# Altium PCB ANA_24.PcbDoc
Units mm, origin at the board's own origin, x right, y up, seen from the top; angles counter-clockwise.
Board outline 51.5 x 33.5 mm, 2 copper layers (Top Layer, Bottom Layer), stack 1.571 mm thick; 2 components, 4 nets, 5 pads, 163 vias.
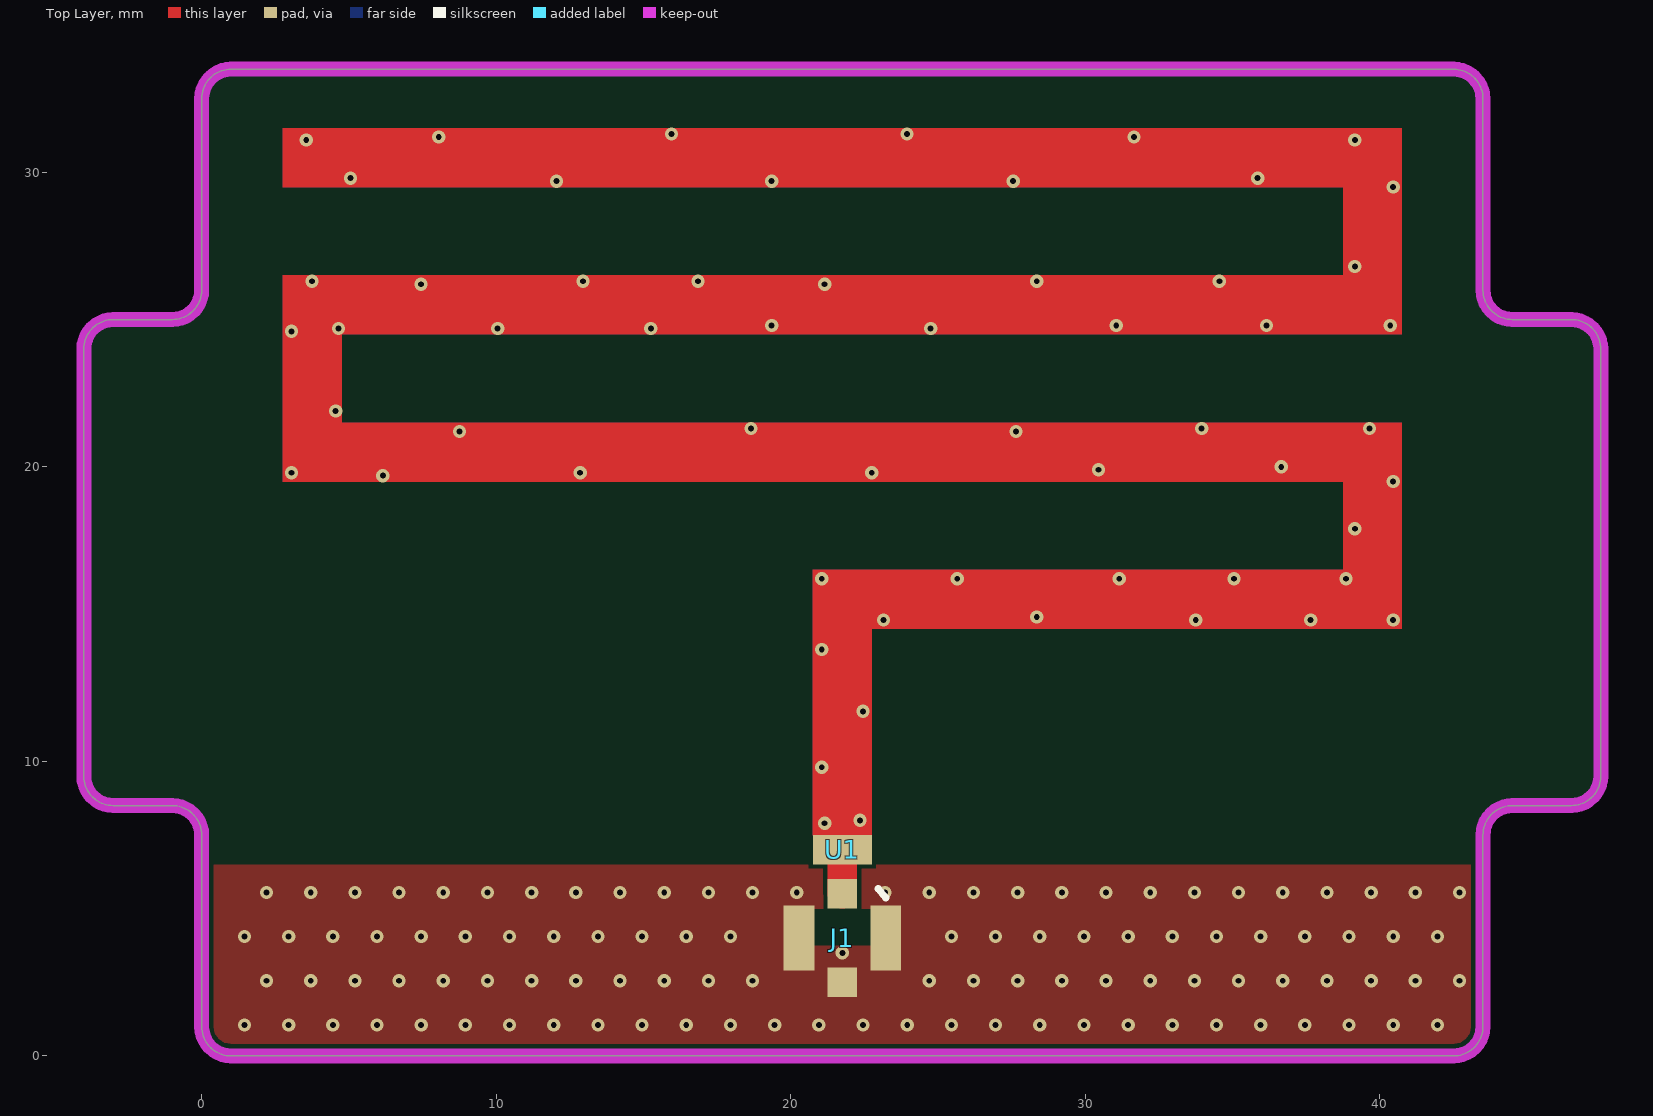
[diagram p0: Top Layer view]
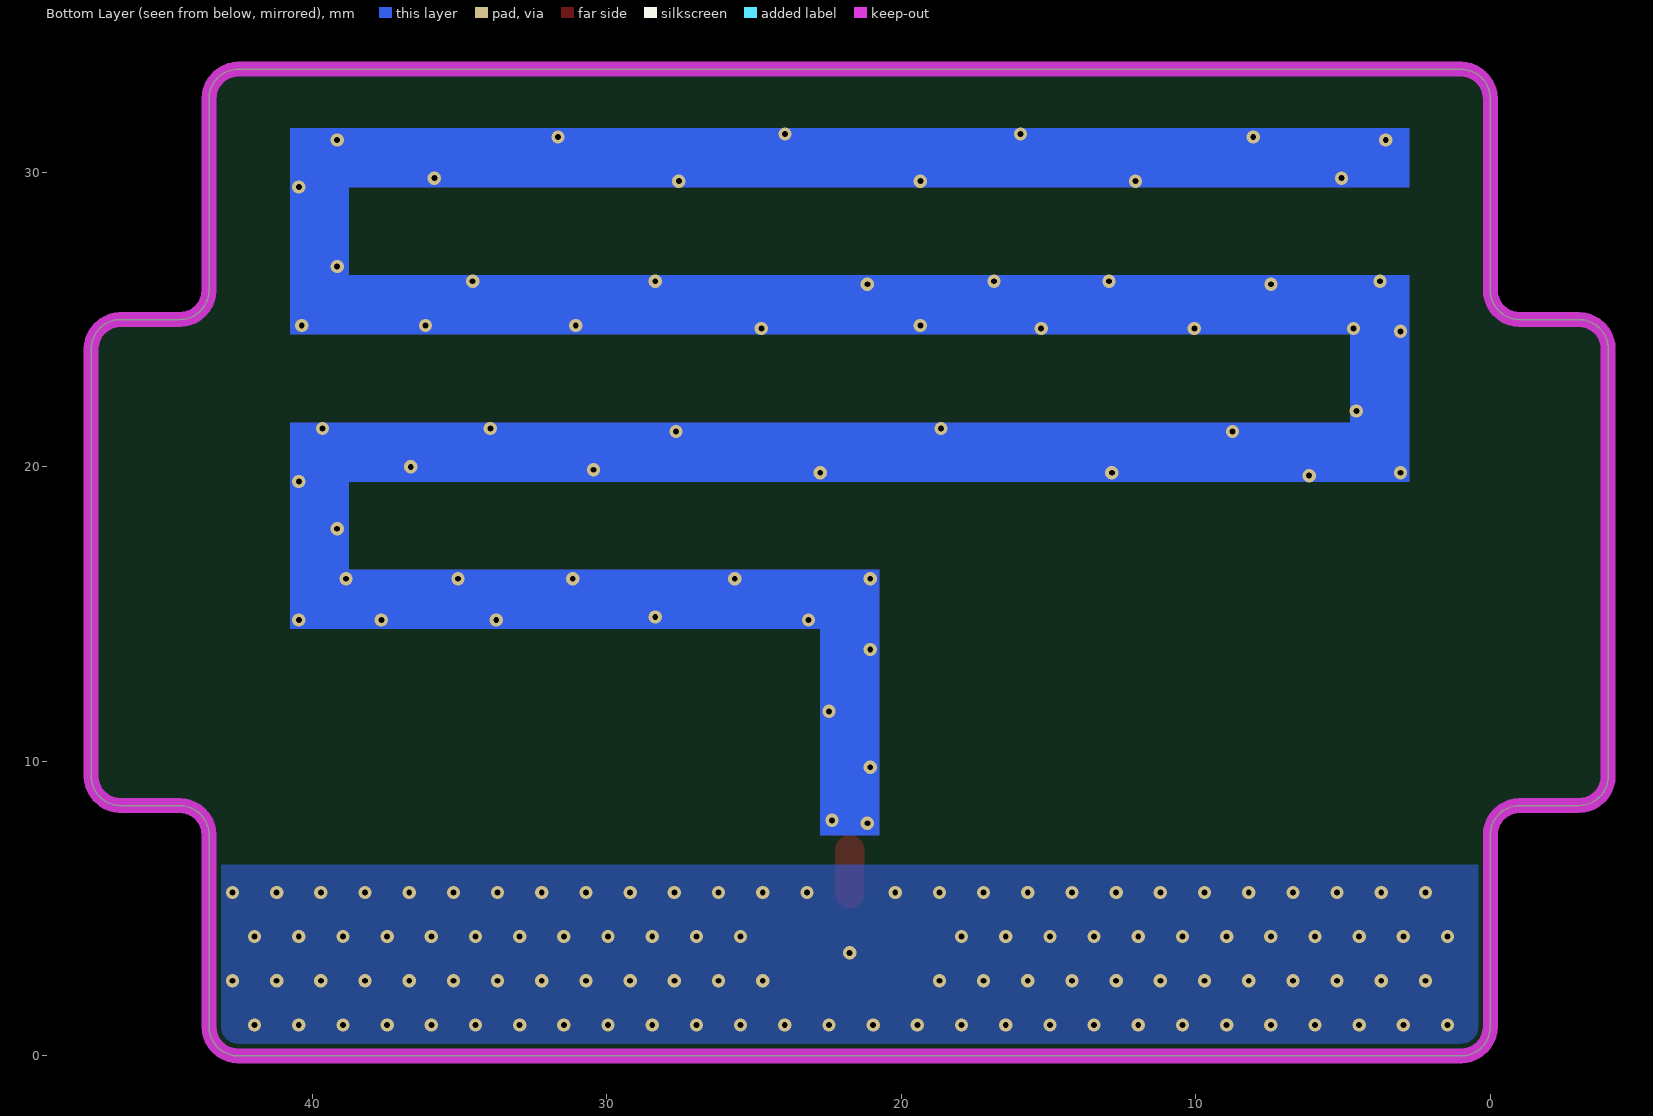
[diagram p1: Bottom Layer view, seen from below]

## Layer stack, top to bottom
Top Solder: solder mask 0.0102, Solder Resist, Dk 3.5
Top Layer: signal copper 0.0356
Dielectric 1: dielectric 1.5, FR-4, Dk 4.8
Bottom Layer: signal copper 0.0356
Bottom Solder: solder mask 0.0102, Solder Resist, Dk 3.5

## Board outline
-3,8.5 -1,8.5 cw(c-1,7.5) 0,7.5 0,1 ccw(c1,1) 1,0 42.5,0 ccw(c42.5,1) 43.5,1 43.5,7.5 cw(c44.5,7.5) 44.5,8.5 46.5,8.5 ccw(c46.5,9.5) 47.5,9.5 47.5,24 ccw(c46.5,24) 46.5,25 44.5,25 cw(c44.5,26) 43.5,26 43.5,32.5 ccw(c42.5,32.5) 42.5,33.5 1,33.5 ccw(c1,32.5) 0,32.5 0,26 cw(c-1,26) -1,25 -3,25 ccw(c-3,24) -4,24 -4,9.5 ccw(c-3,9.5)

## Design rules (kind name [scope] priority, off if disabled: settings)
Clearance [All] p1: gap=0.152 ignorepadtopadclearanceinfootprint=FALSE
PolygonConnect [All] p1: connectstyle=Direct reliefconductorwidth=0.254 reliefentries=4 polygonreliefangle="90 Angle" airgapwidth=0.254
RoutingVias [All] p1: holewidth=0.711 width=1.27 viastyle="Through Hole" minholewidth=0.2 minwidth=0.45 maxholewidth=5 maxwidth=5
SolderMaskExpansion [All] p1: expansion=0.102 istentingtop=FALSE
Width [All] p1: maxlimit=5 minlimit=0.254 preferedwidth=0.254
30 further rules are at their usual default settings.

## Components (designator, comment, footprint, x,y, rotation, side; value= is the part's Value field where it differs from the comment)
J1 "IPEX" molex-73412 21.75,4 r180 top
U1 "ANTENNA_PCB" ANTENNA_DN024N 21.75,7 r0 top

## Footprints (in the part's own frame and the unit in brackets; to place one, negate y for a bottom-side part, rotate by r counter-clockwise, add the part's x,y. Pads: shape width x height; smd on the part's side, far side on the other; paste and mask are expansions set on the pad)
ANTENNA_DN024N [mm] "ANTENNA_DN024N"
  rect 2x1 smd paste-2 mask+0.102: 1(0,0)
  Top Layer region: -1,0.5 1,0.5 1,7.5 19,7.5 19,14.5 -17,14.5 -17,17.5 19,17.5 19,24.5 -19,24.5 -19,22.5 17,22.5 17,19.5 -19,19.5 -19,12.5 17,12.5 17,9.5 -1,9.5 -1,0.5
  Bottom Layer region: -1,0.5 1,0.5 1,7.5 19,7.5 19,14.5 -17,14.5 -17,17.5 19,17.5 19,24.5 -19,24.5 -19,22.5 17,22.5 17,19.5 -19,19.5 -19,12.5 17,12.5 17,9.5 -1,9.5 -1,0.5
molex-73412 [mm]
  rect 1x1 smd: 1(0,-1.5) 3(0,1.5)
  rect 1.05x2.2 smd: 2(1.475,0) 4(-1.475,0)
  silkscreen extent -1.47,-1.68 -1.22,-1.37, body extent -1.5,-1.54 1.5,1.54, height 1.5

## Part data
J1: library part 73412-0110, "RF同轴连接器（天线座）", Manufacturer=MOLEX, Package=SMD, Code=734120110, CompType=IPEX插座, DistributorCode=C434806
U1: Manufacturer=-, Package=P1X1, Code=-, DistributorCode=-

## Via types
v1: diameter 0.45, hole 0.2, Top Layer to Bottom Layer, tented both sides, 163 vias

## Nets (pads, with @x,y where several pads share a name; then routed paths per layer and width w, separated by ;. In a path a pad name is that pad's centre, name@x,y a point inside that pad or via, vN(x,y) a via of type N, cw(c..) or ccw(c..) an arc to the next point about the centre after c; other vN are vias at no path point)
NetJ1_1: J1.1 U1.1 | length 1.5
  Top Layer w1: J1.1 U1.1
  other v1: 21.15,7.9 22.35,8 21.05,9.8 22.45,11.7 21.05,13.8 23.15,14.8 33.75,14.8 37.65,14.8 40.45,14.8 28.35,14.9 21.05,16.2 25.65,16.2 31.15,16.2 35.05,16.2 38.85,16.2 39.15,17.9 40.45,19.5 6.15,19.7 3.05,19.8 12.85,19.8 22.75,19.8 30.45,19.9 36.65,20 8.75,21.2 27.65,21.2 18.65,21.3 33.95,21.3 39.65,21.3 4.55,21.9 3.05,24.6 4.65,24.7 10.05,24.7 15.25,24.7 24.75,24.7 19.35,24.8 31.05,24.8 36.15,24.8 40.35,24.8 7.45,26.2 21.15,26.2 3.75,26.3 12.95,26.3 16.85,26.3 28.35,26.3 34.55,26.3 39.15,26.8 40.45,29.5 12.05,29.7 19.35,29.7 27.55,29.7 5.05,29.8 35.85,29.8 3.55,31.1 39.15,31.1 8.05,31.2 31.65,31.2 15.95,31.3 23.95,31.3
NetJ1_2: J1.2 J1.3 J1.4
  other v1: 1.453,1.052 2.953,1.052 4.453,1.052 5.953,1.052 7.453,1.052 8.953,1.052 10.453,1.052 11.953,1.052 13.453,1.052 14.953,1.052 16.453,1.052 17.953,1.052 19.453,1.052 20.953,1.052 22.453,1.052 23.953,1.052 25.453,1.052 26.953,1.052 28.453,1.052 29.953,1.052 31.453,1.052 32.953,1.052 34.453,1.052 35.953,1.052 37.453,1.052 38.953,1.052 40.453,1.052 41.953,1.052 2.203,2.552 3.703,2.552 5.203,2.552 6.703,2.552 8.203,2.552 9.703,2.552 11.203,2.552 12.703,2.552 14.203,2.552 15.703,2.552 17.203,2.552 18.703,2.552 24.703,2.552 26.203,2.552 27.703,2.552 29.203,2.552 30.703,2.552 32.203,2.552 33.703,2.552 35.203,2.552 36.703,2.552 38.203,2.552 39.703,2.552 41.203,2.552 42.703,2.552 21.75,3.5 1.453,4.052 2.953,4.052 4.453,4.052 5.953,4.052 7.453,4.052 8.953,4.052 10.453,4.052 11.953,4.052 13.453,4.052 14.953,4.052 16.453,4.052 17.953,4.052 25.453,4.052 26.953,4.052 28.453,4.052 29.953,4.052 31.453,4.052 32.953,4.052 34.453,4.052 35.953,4.052 37.453,4.052 38.953,4.052 40.453,4.052 41.953,4.052 2.203,5.552 3.703,5.552 5.203,5.552 6.703,5.552 8.203,5.552 9.703,5.552 11.203,5.552 12.703,5.552 14.203,5.552 15.703,5.552 17.203,5.552 18.703,5.552 20.203,5.552 23.203,5.552 24.703,5.552 26.203,5.552 27.703,5.552 29.203,5.552 30.703,5.552 32.203,5.552 33.703,5.552 35.203,5.552 36.703,5.552 38.203,5.552 39.703,5.552 41.203,5.552 42.703,5.552
NetJ2_1: 
NetJ2_2: 

## Polygon pours and split planes (outlines as drawn)
NetJ1_2 on Top Layer "Top Layer-NetJ1_2" (solid, remove dead copper, pour order 0): 0.004,1.005 0.004,7.505 ccw(c-0.996,7.505) -0.996,8.505 -2.996,8.505 cw(c-2.996,9.505) -3.996,9.505 -3.996,24.005 cw(c-2.996,24.005) -2.996,25.005 -0.996,25.005 ccw(c-0.996,26.005) 0.004,26.005 0.004,32.505 cw(c1.004,32.505) 1.004,33.505 42.504,33.505 cw(c42.504,32.505) 43.504,32.505 43.504,26.005 ccw(c44.504,26.005) 44.504,25.005 46.504,25.005 cw(c46.504,24.005) 47.504,24.005 47.504,9.505 cw(c46.504,9.505) 46.504,8.505 44.504,8.505 ccw(c44.504,7.505) 43.504,7.505 43.504,1.005 cw(c42.504,1.005) 42.504,0.005 1.004,0.005 cw(c1.004,1.005)
NetJ1_2 on Bottom Layer "Bottom Layer-NetJ1_2" (solid, remove dead copper, pour order 1): 0.004,1.005 0.004,7.505 ccw(c-0.996,7.505) -0.996,8.505 -2.996,8.505 cw(c-2.996,9.505) -3.996,9.505 -3.996,24.005 cw(c-2.996,24.005) -2.996,25.005 -0.996,25.005 ccw(c-0.996,26.005) 0.004,26.005 0.004,32.505 cw(c1.004,32.505) 1.004,33.505 42.504,33.505 cw(c42.504,32.505) 43.504,32.505 43.504,26.005 ccw(c44.504,26.005) 44.504,25.005 46.504,25.005 cw(c46.504,24.005) 47.504,24.005 47.504,9.505 cw(c46.504,9.505) 46.504,8.505 44.504,8.505 ccw(c44.504,7.505) 43.504,7.505 43.504,1.005 cw(c42.504,1.005) 42.504,0.005 1.004,0.005 cw(c1.004,1.005)

## Keep-outs
Keep-Out Layer:
  the board outline again, w0.508

## Other copper
Top Layer:
  pour cut-out: 20.75,5 22.75,5 22.75,3.75 20.75,3.75
  pour cut-out: 47.75,6.5 47.75,33.75 -4,33.75 -4,6.5
Bottom Layer:
  pour cut-out: 47.75,6.5 47.75,33.75 -4,33.75 -4,6.5

## Silkscreen, mask and mechanical layers (free items; w line width, h text height)
Top Solder:
  rectangle: 20.25,2.75 23.25,5
Mechanical 1:
  the board outline again, w0.127